# EAGLE board BMS Adapter rev2 (EAGLE 9.1.3)
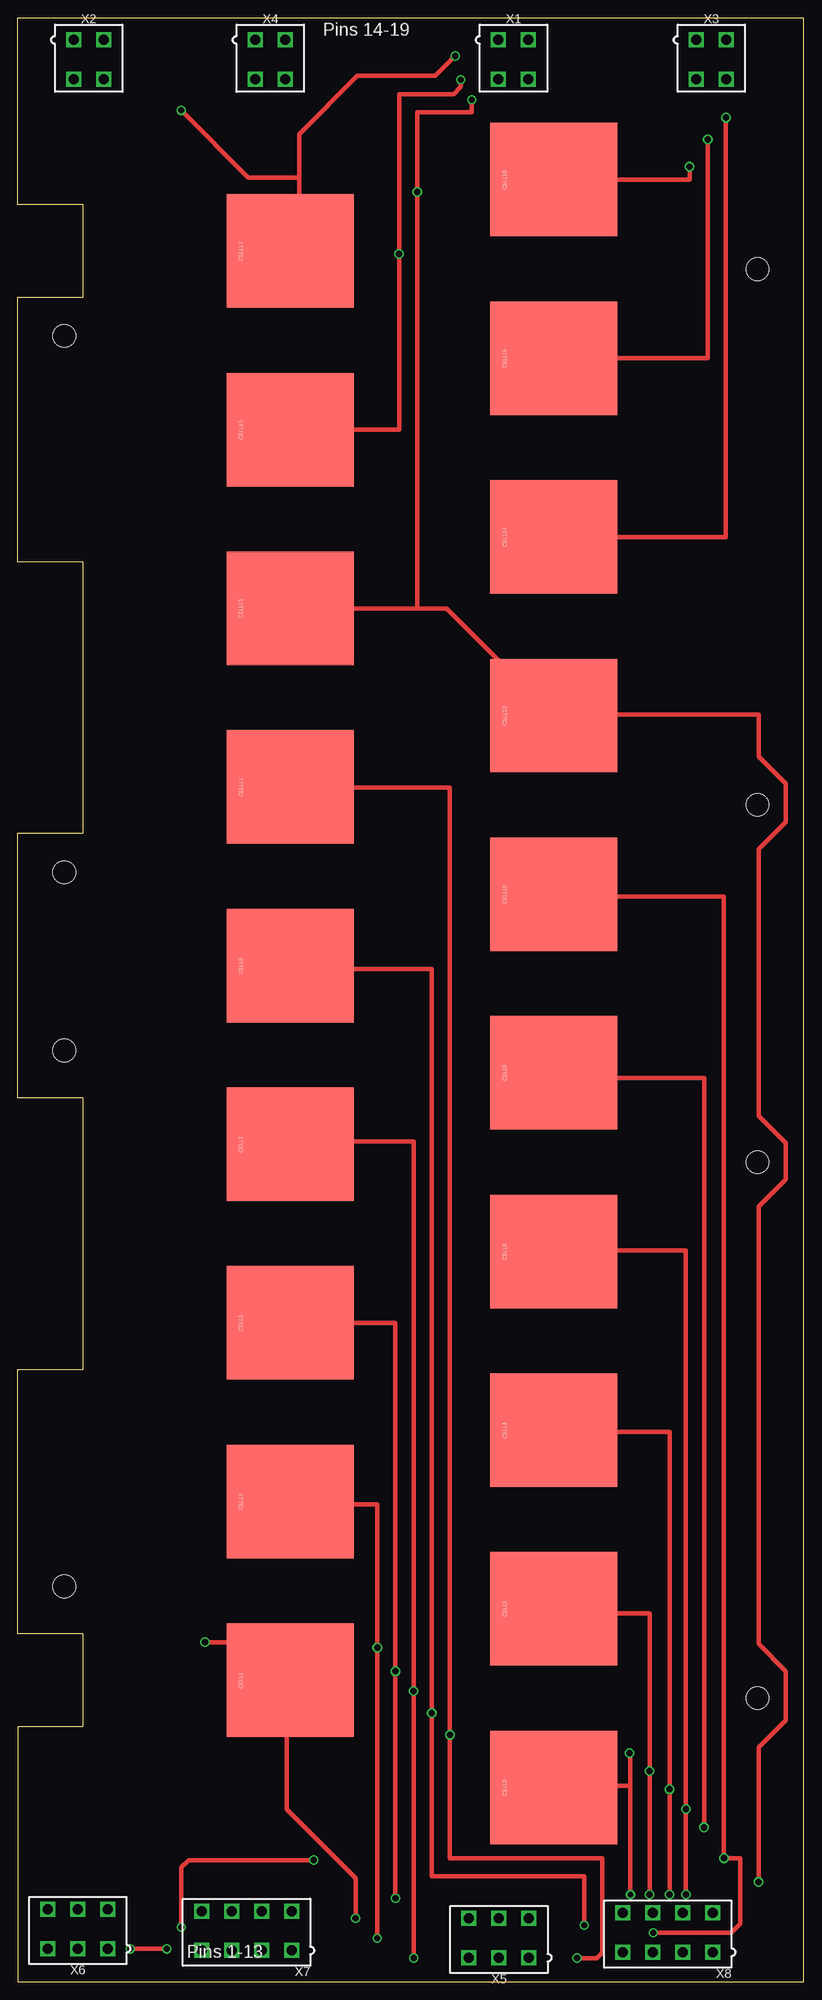
[diagram p0: board, top side]
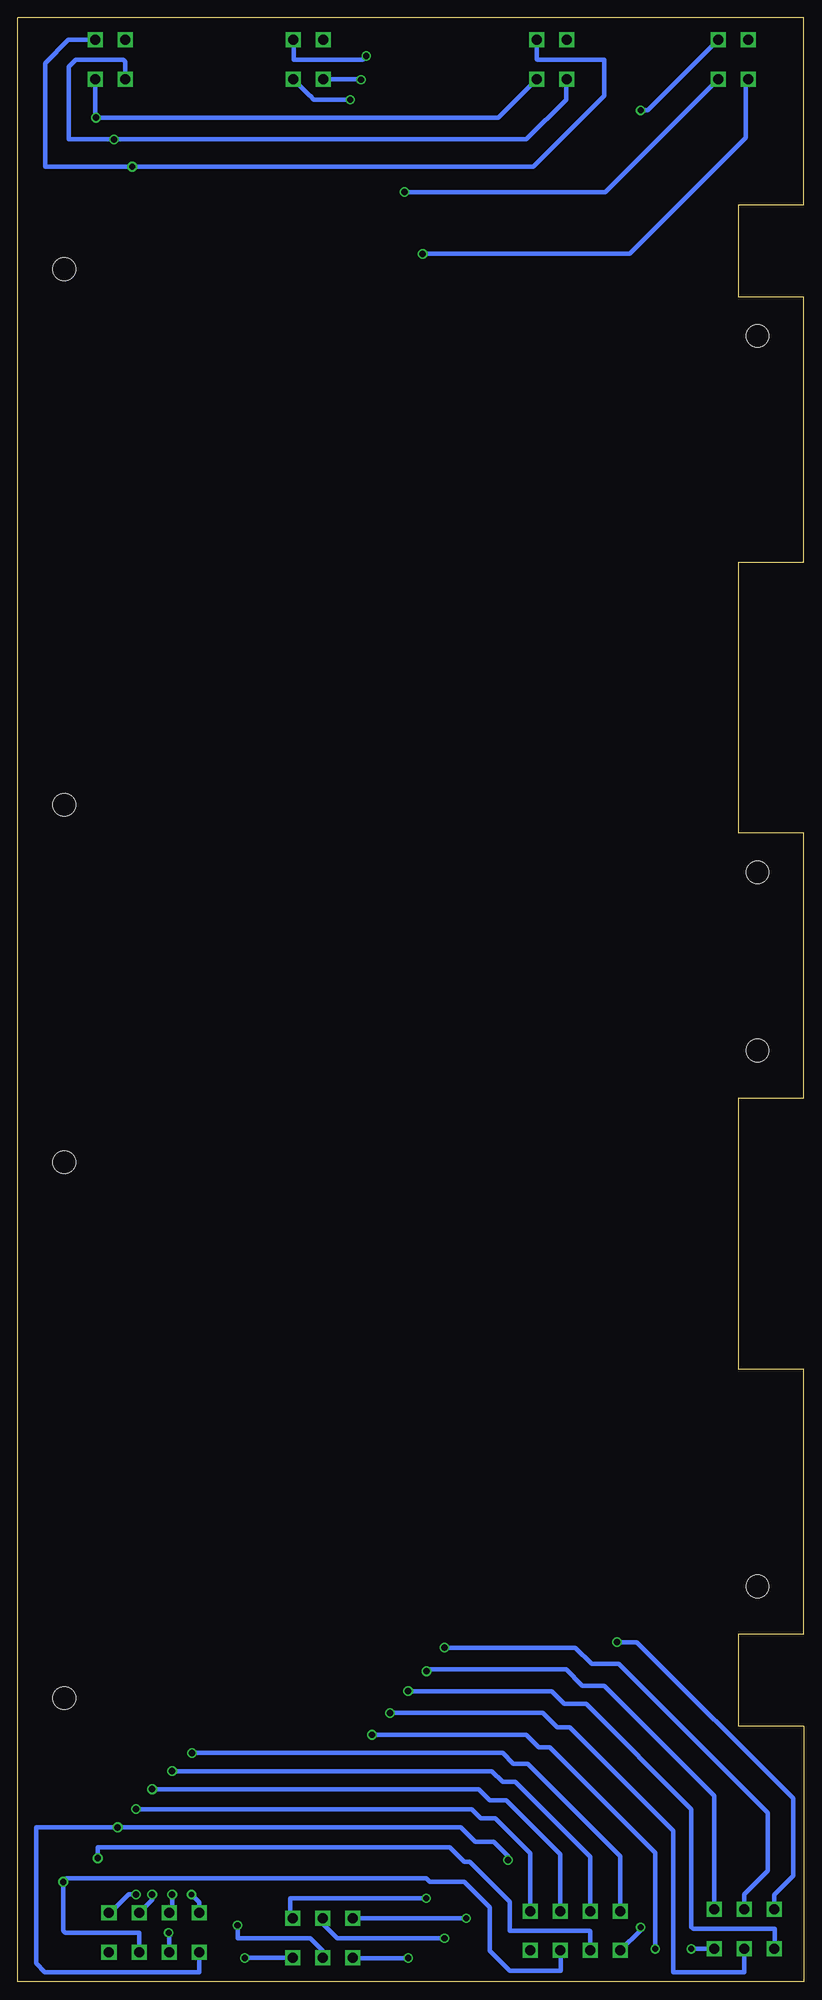
[diagram p1: board, bottom side, seen from below]

Size 109.98 x 274.83 mm. Coordinates in mm from the lower left corner, seen from the top.
Outline: 0,0 109.98,0 109.98,274.83 0,274.83 0,248.67 9.14,248.67 9.14,235.71 0,235.71 0,198.67 9.14,198.67 9.14,160.71 0,160.71 0,123.67 9.14,123.67 9.14,85.71 0,85.71 0,48.67 9.14,48.67 9.14,35.71 0,35.71 0,0
Copper layers (1*16): Top 0.035mm / dielectric 1.5mm / Bottom 0.035mm
Design rules "DRC Advanced Circuits *": minimum track width 6mil, minimum drill 15mil, track to track 24mil, track to pad 24mil, pad to pad 24mil, via to via 24mil, smd to smd 24mil, copper to edge 40mil, drill to drill 6mil, minimum pad ring 10mil, minimum via ring 8mil, stop-mask expansion 4mil, vias tented up to drill 0mil, thermal gap 10mil
Holes 3.2 mm at 6.5,55.31 6.5,130.31 103.5,114.69 103.5,39.69 6.5,155.25 103.5,164.69 6.49,230.31 103.5,239.66
bKeepout: area 58.4,0 to 110,12.7; area 53.3,262.1 to 110,274.8; area 0,0 to 58.4,12.7; area 0,262.1 to 53.3,274.8

## Footprints (pad centres in the part's own frame; a part is rotated, then mirrored left to right if it is on the bottom)
KEYSTONE5222 = smd 15.875 x 17.78: P$1 0,0
MINIFIT_5566-4 = drill 1.4 square: 1 2.1,-2.75; 2 -2.1,-2.75; 3 2.1,2.75; 4 -2.1,2.75
MINIFIT_5566-6 = drill 1.4 square: 1 4.2,-2.75; 2 0,-2.75; 3 -4.2,-2.75; 4 4.2,2.75; 5 0,2.75; 6 -4.2,2.75
MINIFIT_5566-8 = drill 1.4 square: 1 6.3,-2.75; 2 2.1,-2.75; 3 -2.1,-2.75; 4 -6.3,-2.75; 5 6.3,2.75; 6 2.1,2.75; 7 -2.1,2.75; 8 -6.3,2.75

## Placement (x,y rotation side)
CELL0  BATTERY_SPRING_KEYSTONE5222  [KEYSTONE5222]  75,27.19 270 top
CELL1  BATTERY_SPRING_KEYSTONE5222  [KEYSTONE5222]  38.1,42.19 270 top
CELL2  BATTERY_SPRING_KEYSTONE5222  [KEYSTONE5222]  75,52.19 270 top
CELL3  BATTERY_SPRING_KEYSTONE5222  [KEYSTONE5222]  38.1,67.19 270 top
CELL4  BATTERY_SPRING_KEYSTONE5222  [KEYSTONE5222]  75,77.19 270 top
CELL5  BATTERY_SPRING_KEYSTONE5222  [KEYSTONE5222]  38.1,92.19 270 top
CELL6  BATTERY_SPRING_KEYSTONE5222  [KEYSTONE5222]  75,102.19 270 top
CELL7  BATTERY_SPRING_KEYSTONE5222  [KEYSTONE5222]  38.1,117.19 270 top
CELL8  BATTERY_SPRING_KEYSTONE5222  [KEYSTONE5222]  75,127.19 270 top
CELL9  BATTERY_SPRING_KEYSTONE5222  [KEYSTONE5222]  38.1,142.19 270 top
CELL10  BATTERY_SPRING_KEYSTONE5222  [KEYSTONE5222]  75,152.19 270 top
CELL11  BATTERY_SPRING_KEYSTONE5222  [KEYSTONE5222]  38.1,167.19 270 top
CELL12  BATTERY_SPRING_KEYSTONE5222  [KEYSTONE5222]  75,177.19 270 top
CELL13  BATTERY_SPRING_KEYSTONE5222  [KEYSTONE5222]  38.1,192.19 270 top
CELL14  BATTERY_SPRING_KEYSTONE5222  [KEYSTONE5222]  75,202.19 270 top
CELL15  BATTERY_SPRING_KEYSTONE5222  [KEYSTONE5222]  38.1,217.19 270 top
CELL16  BATTERY_SPRING_KEYSTONE5222  [KEYSTONE5222]  75,227.19 270 top
CELL17  BATTERY_SPRING_KEYSTONE5222  [KEYSTONE5222]  38.1,242.19 270 top
CELL18  BATTERY_SPRING_KEYSTONE5222  [KEYSTONE5222]  75,252.19 270 top
X1  CONNECTOR-4  [MINIFIT_5566-4]  69.34,268.99 180 top
X2  CONNECTOR-4  [MINIFIT_5566-4]  9.91,268.99 180 top
X3  CONNECTOR-4  [MINIFIT_5566-4]  97.03,268.99 180 top
X4  CONNECTOR-4  [MINIFIT_5566-4]  35.31,268.99 180 top
X5  CONNECTOR-6  [MINIFIT_5566-6]  67.31,6.1 0 top
X6  CONNECTOR-6  [MINIFIT_5566-6]  8.38,7.37 0 top
X7  CONNECTOR-8  [MINIFIT_5566-8]  32,7.11 0 top
X8  CONNECTOR-8  [MINIFIT_5566-8]  90.93,6.86 0 top

## Library data of the parts
CELL0 CELL1-CELL18 = HyTechDevices
X1-X4 X7 X8 = HyTechDevices; OC_FARNELL: unknown; OC_NEWARK: unknown
X5 X6 = HyTechDevices; MPN: 95566-61002; OC_FARNELL: unknown; OC_NEWARK: 22K8620

## Nets
CELL0: CELL0.P$1 X7.8 X8.8
CELL1: CELL1.P$1 X5.6 X6.6
CELL2: CELL2.P$1 X7.7 X8.7
CELL3: CELL3.P$1 X5.5 X6.5
CELL4: CELL4.P$1 X7.6 X8.6
CELL5: CELL5.P$1 X5.4 X6.4
CELL6: CELL6.P$1 X7.5 X8.5
CELL7: CELL7.P$1 X5.3 X6.3
CELL8: CELL8.P$1 X7.4 X8.4
CELL9: CELL9.P$1 X5.2 X6.2
CELL10: CELL10.P$1 X7.3 X8.3
CELL11: CELL11.P$1 X5.1 X6.1
CELL12: CELL12.P$1 CELL13.P$1 X1.4 X2.4 X7.2 X8.2
CELL14: CELL14.P$1 X3.4 X4.4
CELL15: CELL15.P$1 X1.3 X2.3
CELL16: CELL16.P$1 X3.3 X4.3
CELL17: CELL17.P$1 X1.2 X2.2
CELL18: CELL18.P$1 X3.2 X4.2

## Tracks (layer width: path | path; a pad name or v marks a point on that pad's centre or on a via)
CELL0  (via drill 0.75 pad 1.3, 0.9)
  Top 0.61: 85.7,27.43 76.96,27.43 75.69,26.16 75.69,26.49 CELL0.P$1 | v85.7,12.19 85.7,27.43 | 85.7,27.43 85.7,31.9 v85.6,32
  Bottom 0.61: v85.6,32 42.16,32 40.64,30.48 38.61,30.48 25.7,17.58 X7.8 | v85.7,12.19 84.63,11.13 X8.8
CELL1  (via drill 0.85, 0.9)
  Top 0.61: v26.16,47.5 32.79,47.5 CELL1.P$1 38.1,41.4 37.59,41.4 37.59,24.13 47.24,14.48 v47.24,8.89
  Bottom 0.61: v26.16,47.5 23.37,47.5 1.52,25.65 1.52,14.81 4.18,12.15 X6.6 | v47.24,8.89 63.07,8.89 X5.6
CELL2  (via drill 0.9)
  Top 0.61: CELL2.P$1 75.62,51.56 88.39,51.56 v88.39,29.46 v88.39,12.19
  Bottom 0.61: v88.39,29.46 43.69,29.46 42.16,27.94 40.39,27.94 29.9,17.46 X7.7 | v88.39,12.19 88.39,10.05 X8.7
CELL3  (via drill 0.85, 0.9)
  Top 0.61: v50.29,6.1 v50.29,46.74 50.29,66.8 38.1,66.8 CELL3.P$1
  Bottom 0.61: v50.29,46.74 32,46.74 29.72,44.45 25.91,44.45 5.08,23.62 5.08,15.49 8.38,12.19 X6.5 | v50.29,6.1 65.32,6.1 67.31,8.08 X5.5
CELL4  (via drill 0.9)
  Top 0.61: CELL4.P$1 75.47,77.19 75.69,76.96 91.19,76.96 v91.19,26.92 v91.19,12.19
  Bottom 0.61: v91.19,26.92 45.47,26.92 43.94,25.4 41.66,25.4 34.1,17.85 X7.6 | v91.19,12.19 91.19,11.45 X8.6
CELL5  (via drill 0.85, 0.9)
  Top 0.61: CELL5.P$1 38.1,92.2 52.83,92.2 v52.83,43.43 v52.83,11.68
  Bottom 0.61: v52.83,43.43 52.58,43.69 33.27,43.69 30.99,41.4 27.94,41.4 12.57,26.04 12.58,26.03 X6.4 | v52.83,11.68 71.88,11.68 71.88,9.22 X5.4
CELL6  (via drill 0.9)
  Top 0.61: CELL6.P$1 74.82,102.36 93.47,102.36 v93.47,24.13 v93.47,12.19
  Bottom 0.61: v93.47,24.13 46.48,24.13 45.21,22.86 43.18,22.86 38.3,17.98 X7.5 | v93.47,12.19 94.49,12.19 97.07,9.61 X8.5
CELL7  (via drill 0.85, 0.9)
  Top 0.61: CELL7.P$1 38.1,117.6 55.37,117.6 v55.37,40.64 v55.37,3.3
  Bottom 0.61: v55.37,40.64 35.31,40.64 33.53,38.86 30.48,38.86 15.75,24.13 15.75,7.62 15.49,7.37 4.06,7.37 4.06,4.73 X6.3 | v55.37,3.3 63.07,3.3 X5.3
CELL8  (via drill 0.85, 0.9)
  Top 0.61: CELL8.P$1 75.57,127.76 75.69,127.76 76.96,126.49 96.01,126.49 v96.01,21.59 | v41.4,17.02 23.88,17.02 22.86,16 v22.86,7.62
  Bottom 0.61: v41.4,17.02 41.4,17.53 43.43,19.56 45.97,19.56 48.01,21.59 v96.01,21.59 107.44,21.59 107.44,2.54 106.22,1.32 84.58,1.32 84.58,4.06 X8.4 | v22.86,7.62 22.86,7.21 X7.4
CELL9  (via drill 0.85, 0.9)
  Top 0.61: CELL9.P$1 38.1,141.73 57.91,141.73 v57.91,37.59 57.91,14.73 79.25,14.73 v79.25,7.87
  Bottom 0.61: v57.91,37.59 36.58,37.59 34.54,35.56 32.77,35.56 18.29,21.08 18.29,1.32 8.38,1.32 X6.2 | X5.2 67.31,4.32 69.09,6.1 79.25,6.1 v79.25,7.87
CELL10  (via drill 0.85, 0.9)
  Top 0.61: CELL10.P$1 75.29,151.89 98.74,151.89 98.74,17.27 v98.81,17.27 101.09,17.27 101.09,8.13 99.82,6.86 v88.9,6.86
  Bottom 0.61: v98.81,17.27 98.81,18.8 49.53,18.8 47.5,16.76 46.74,16.76 41.15,11.18 41.15,7.11 29.97,7.11 29.9,7.04 X7.3 | v88.9,6.86 88.83,6.79 X8.3
CELL11  (via drill 0.85, 0.9)
  Top 0.61: CELL11.P$1 38.16,167.13 60.45,167.13 v60.45,34.54 60.45,17.27 81.79,17.27 81.79,4.06 81.03,3.3 v78.23,3.3 | v20.83,4.57 v15.75,4.57
  Bottom 0.61: v60.45,34.54 38.86,34.54 37.08,32.77 35.56,32.77 20.83,18.03 v20.83,4.57 | X5.1 78.19,3.35 v78.23,3.3 | v15.75,4.57 15.7,4.62 X6.1
CELL12  (via drill 0.85, 0.9)
  Top 0.61: v103.63,13.97 103.63,32.77 107.44,36.58 107.44,43.43 103.63,47.24 103.63,108.46 107.44,112.27 107.44,117.35 103.63,121.16 103.63,158.5 107.44,162.31 107.44,167.64 103.63,171.45 103.63,177.29 75.1,177.29 CELL12.P$1 59.99,192.19 55.88,192.19 | CELL13.P$1 55.88,192.19 | 55.88,192.19 v55.88,250.44 55.88,261.62 63.5,261.62 v63.5,263.4
  Bottom 0.61: X1.4 69.11,263.91 69.09,263.91 68.58,263.4 v63.5,263.4 | X2.4 27.8,250.44 v55.88,250.44 | X7.2 34.04,4.29 34.04,1.52 41.15,1.52 43.94,4.32 43.94,10.41 47.5,13.97 52.32,13.97 52.83,14.48 103.12,14.48 v103.63,13.97 103.63,7.11 103.38,6.86 92.96,6.86 92.96,4.18 X8.2
CELL14  (via drill 0.9)
  Top 0.61: CELL14.P$1 99.06,202.19 v99.06,260.86
  Bottom 0.61: X3.4 99.13,260.93 v99.06,260.86 42.78,260.86 X4.4
CELL15  (via drill 0.85, 0.9)
  Top 0.61: CELL15.P$1 53.34,217.19 v53.34,241.81 53.34,264.16 60.96,264.16 61.98,265.18 v61.98,266.19
  Bottom 0.61: X1.3 62.02,266.24 v61.98,266.19 | X2.3 8.13,265.91 8.13,258.06 24.38,241.81 v53.34,241.81
CELL16  (via drill 0.9)
  Top 0.61: CELL16.P$1 96.52,227.19 v96.52,257.81
  Bottom 0.61: X3.3 94.93,268.66 95.25,268.99 101.85,268.99 102.87,267.97 102.87,257.81 v96.52,257.81 38.86,257.81 33.27,263.4 33.27,266.17 X4.3
CELL17  (via drill 0.85)
  Top 0.61: 39.37,252.48 39.37,242.19 CELL17.P$1 | 39.37,252.48 39.37,258.57 47.5,266.7 58.42,266.7 v61.21,269.49 | 39.37,252.48 32.26,252.48 v22.86,261.87
  Bottom 0.61: X1.2 71.37,271.67 71.37,268.99 61.72,268.99 v61.21,269.49 | X2.2 21.87,261.87 v22.86,261.87
CELL18  (via drill 0.9)
  Top 0.61: CELL18.P$1 93.98,252.19 v93.98,254
  Bottom 0.61: X3.2 102.91,271.74 106.17,268.48 106.17,254 v93.98,254 37.85,254 27.94,263.91 27.94,268.99 37.34,268.99 37.41,269.05 X4.2

## Text on the board
tPlace: Pins 14-19 | Pins 1-13
tDocu: Rubout entire top layer / / Rubout bottom layer / around connectors / (see bKeepout layer)